# EAGLE board Brilliant Snicket-Stantia (EAGLE 7.6.0)

Size 56.82 x 53.33 mm. Coordinates in mm from the lower left corner, seen from the top.
Outline: 0,0 56.82,0 56.82,53.33 0,53.33 0,0
Copper layers (1*16): Top 0.035mm / dielectric 1.5mm / Bottom 0.035mm
Design rules "default": minimum track width 10mil, minimum drill 24mil, track to track 8mil, track to pad 8mil, pad to pad 8mil, via to via 8mil, smd to smd 8mil, copper to edge 40mil, drill to drill 8mil, minimum pad ring 10mil, minimum via ring 8mil, stop-mask expansion 4mil, vias tented up to drill 0mil, thermal gap 10mil

## Footprints (pad centres in the part's own frame; a part is rotated, then mirrored left to right if it is on the bottom)
DC-POWER = drill 0.889 pad 2.54 octagon: + 0,2.54; - 0,-2.54
C5B2.5 = drill 0.813 pad 1.6 octagon: 1 -2.54,0; 2 2.54,0
D-7.5 = drill 0.813 long: A 3.81,0; C -3.81,0
LED5MM = drill 0.813 octagon: A -1.27,0; K 1.27,0
0207/10 = drill 0.813 octagon: 1 -5.08,0; 2 5.08,0
DIL08 = drill 0.813 pad 1.27: 1 -3.81,-3.81; 2 -1.27,-3.81; 3 1.27,-3.81; 4 3.81,-3.81; 5 3.81,3.81; 6 1.27,3.81; 7 -1.27,3.81; 8 -3.81,3.81

## Placement (x,y rotation side)
BAT1  [DC-POWER]  5,22.78 0 top
C1  5000nF  [C5B2.5]  5,73.58 0 top  (outside the outline)
D2  [D-7.5]  5,48.18 0 top
D4  [LED5MM]  5,86.28 0 top  (outside the outline)
R1  100k‎Ω  [0207/10]  5,35.48 0 top
R2  100k‎Ω  [0207/10]  5,60.88 0 top  (outside the outline)
R3  1k‎Ω  [0207/10]  5,98.98 0 top  (outside the outline)
U2  [DIL08]  5,10.08 0 top

## Library data of the parts
BAT1 C1 D2 D4 R1-R3 U2 = AUTODESK_CIRCUITS_BREADBOARD

## Nets
N$1: D4.A U2.3
N$2: D4.K R3.2
N$3: BAT1.- C1.1 R3.1 U2.1
N$4: U2.5
N$5: D2.A R1.2 R2.1 U2.7
N$6: BAT1.+ R2.2 U2.4 U2.8
N$7: C1.2 D2.C R1.1 U2.2 U2.6

## Tracks (layer width: path | path; a pad name or v marks a point on that pad's centre or on a via)
N$1  (1 unrouted)
N$2  (1 unrouted)
N$3  (3 unrouted)
N$5  (3 unrouted)
N$6  (3 unrouted)
N$7  (4 unrouted)